# Altium PCB Team_2_PCB.PcbDoc
Units mm, origin at the board's own origin, x right, y up, seen from the top; angles counter-clockwise.
Board outline 58 x 58 mm, 2 copper layers (Top Layer, Bottom Layer), stack 1.58 mm thick; 39 components, 33 nets, 173 pads, 10 vias.
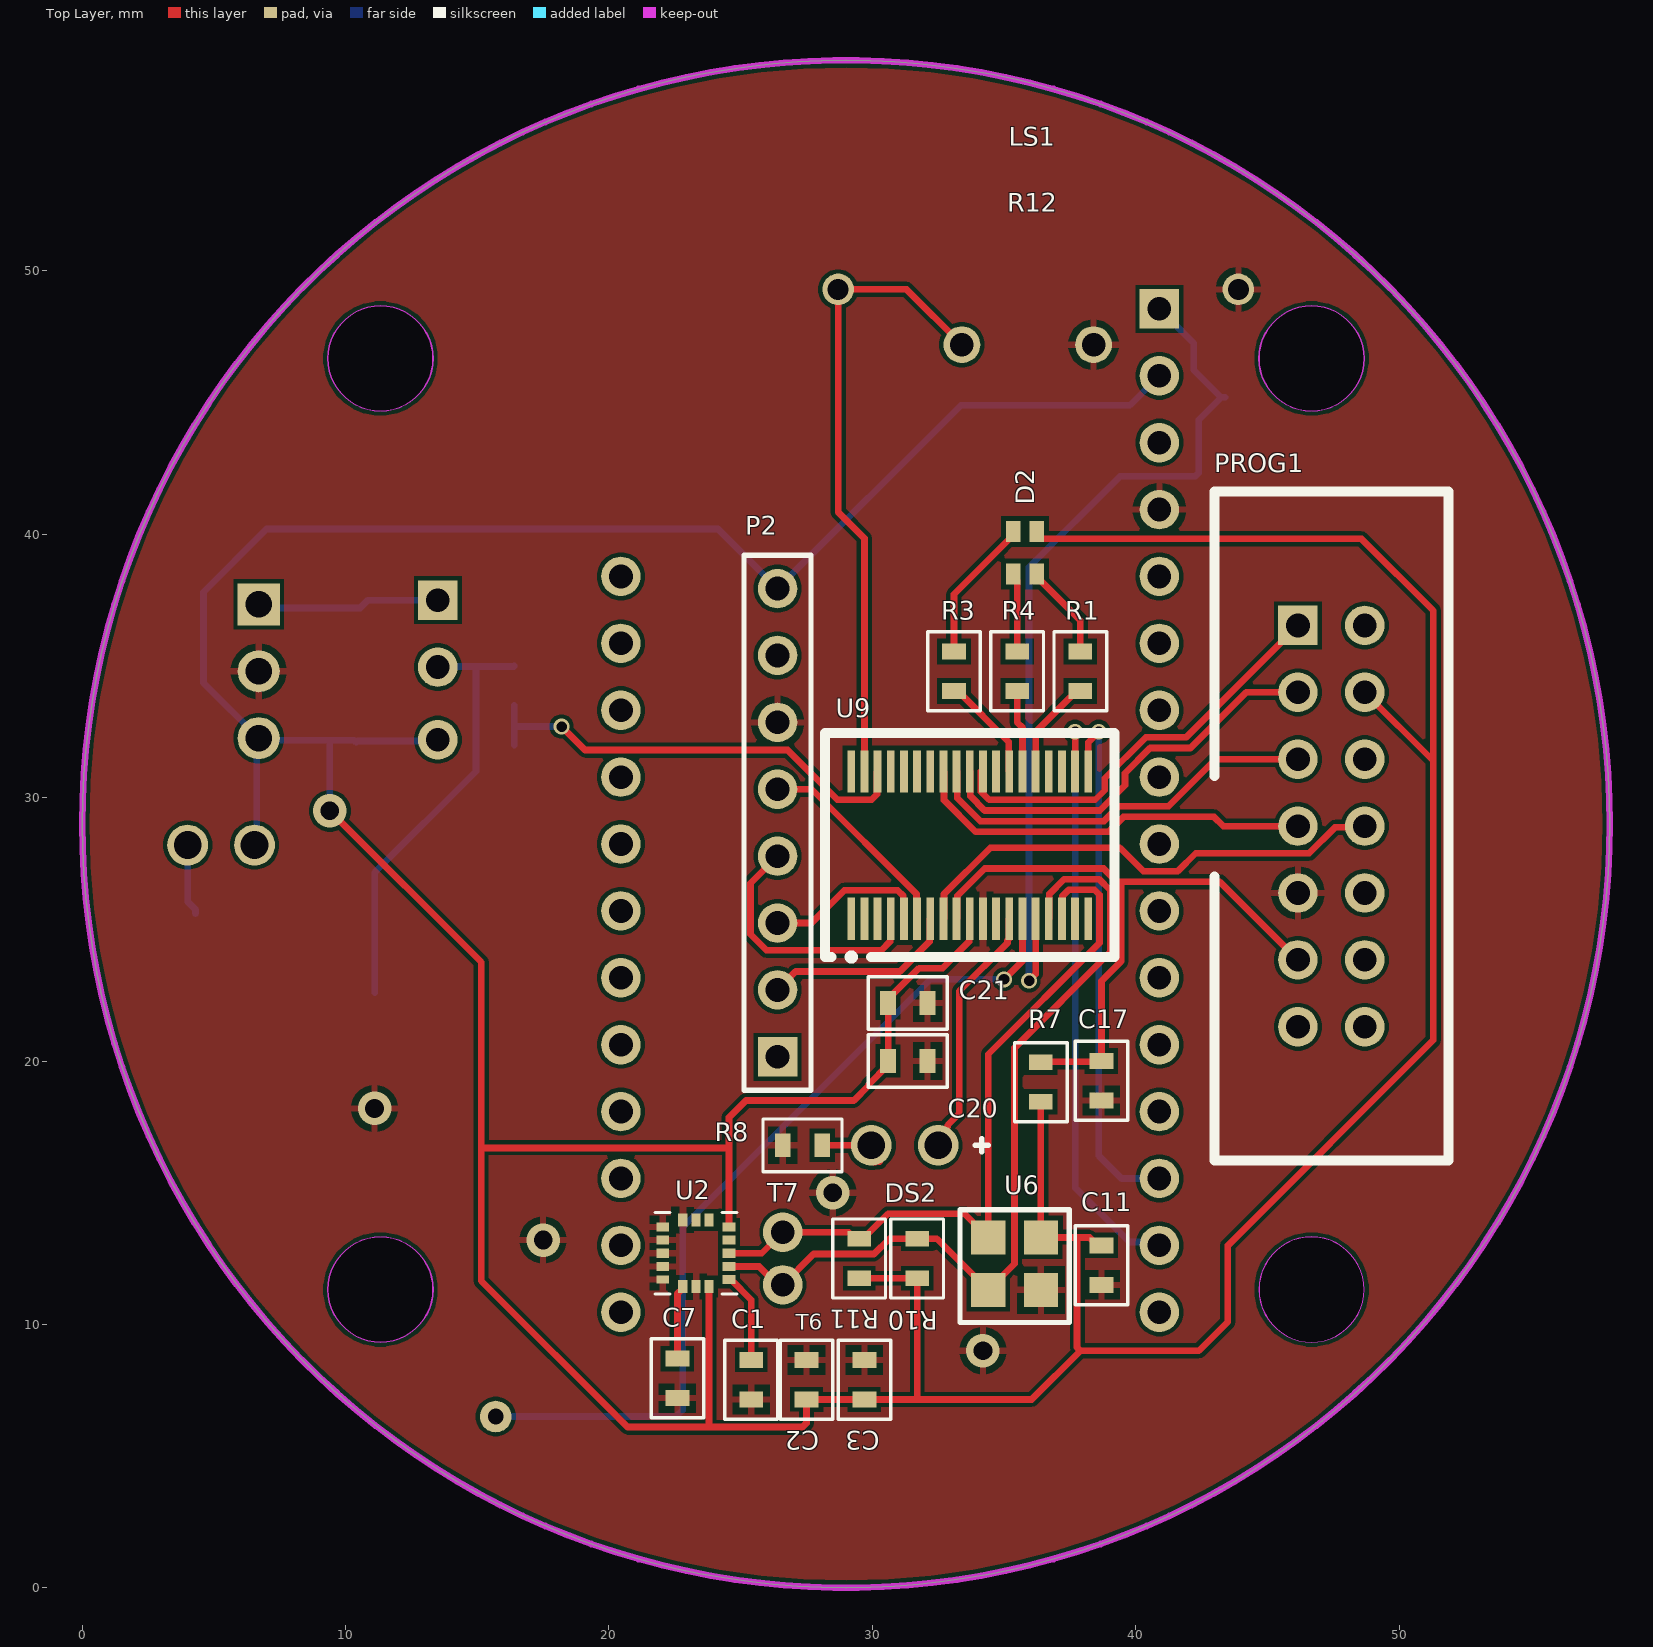
[diagram p0: Top Layer view]
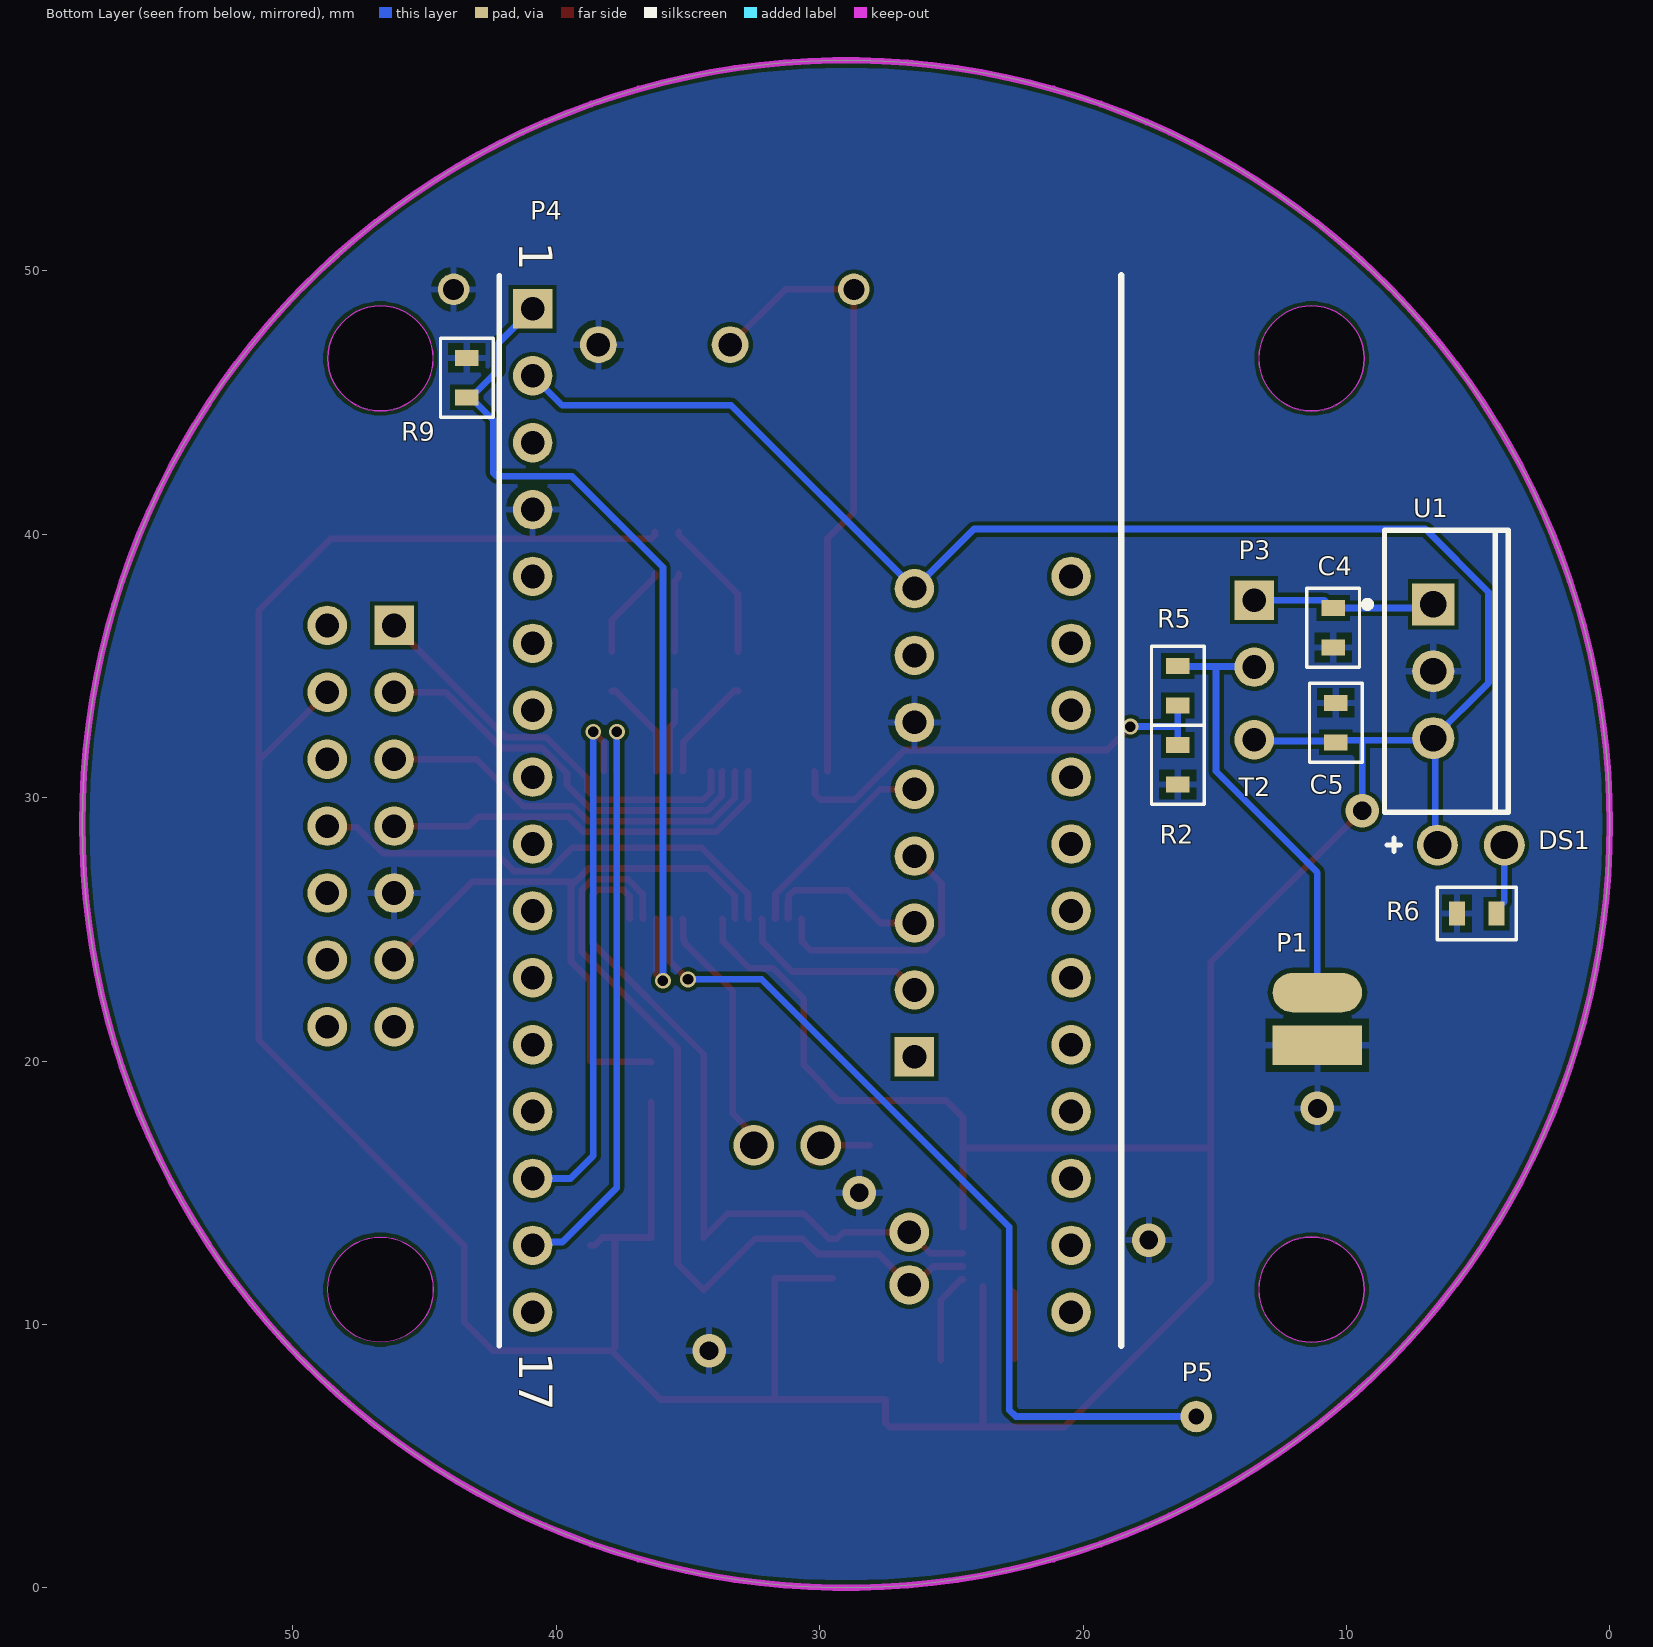
[diagram p1: Bottom Layer view, seen from below]

## Layer stack, top to bottom
Top Solder: solder mask 0.0254, SM-001, Dk 4
Top Layer: signal copper 0.0356
Dielectric 1: dielectric 1.5086, FR-4, Dk 4.8
Bottom Layer: signal copper 0.0356
Bottom Solder: solder mask 0.0254, SM-001, Dk 4

## Board outline
29,0 cw(c29,29) 0,29 cw(c29,29) 29,58 cw(c29,29) 58,29 cw(c29,29)
cut-out: 46.678,44.678 cw(c46.678,46.678) 44.678,46.678 cw(c46.678,46.678) 46.678,48.678 cw(c46.678,46.678) 48.678,46.678 cw(c46.678,46.678)
cut-out: 11.322,44.678 cw(c11.322,46.678) 9.322,46.678 cw(c11.322,46.678) 11.322,48.678 cw(c11.322,46.678) 13.322,46.678 cw(c11.322,46.678)
cut-out: 44.678,11.322 ccw(c46.678,11.322) 46.678,9.322 ccw(c46.678,11.322) 48.678,11.322 ccw(c46.678,11.322) 46.678,13.322 ccw(c46.678,11.322)
cut-out: 11.322,9.322 cw(c11.322,11.322) 9.322,11.322 cw(c11.322,11.322) 11.322,13.322 cw(c11.322,11.322) 13.322,11.322 cw(c11.322,11.322)
board region "Default Layer Stack Region": 29,0 28.186,0 26.562,0.091 24.944,0.273 23.34,0.546 21.754,0.908 20.19,1.359 18.654,1.896 17.15,2.519 15.684,3.225 14.26,4.012 12.882,4.878 11.555,5.82 10.283,6.834 9.069,7.919 7.919,9.069 6.834,10.283 5.82,11.555 4.878,12.882 4.012,14.26 3.225,15.684 2.519,17.15 1.896,18.654 1.359,20.19 0.908,21.754 0.546,23.34 0.273,24.944 0.091,26.562 0,28.186 0,29 0,29.814 0.091,31.438 0.273,33.056 0.546,34.66 0.908,36.246 1.359,37.81 1.896,39.346 2.519,40.85 3.225,42.316 4.012,43.74 4.878,45.118 5.82,46.445 6.834,47.717 7.919,48.931 9.069,50.081 10.283,51.166 11.555,52.18 12.882,53.122 14.26,53.988 15.684,54.775 17.15,55.481 18.654,56.104 20.19,56.641 21.754,57.092 23.34,57.454 24.944,57.727 26.562,57.909 28.186,58 29,58 29.814,58 31.438,57.909 33.056,57.727 34.66,57.454 36.246,57.092 37.81,56.641 39.346,56.104 40.85,55.481 42.316,54.775 43.74,53.988 45.118,53.122 46.445,52.18 47.717,51.166 48.931,50.081 50.081,48.931 51.166,47.717 52.18,46.445 53.122,45.118 53.988,43.74 54.775,42.316 55.481,40.85 56.104,39.346 56.641,37.81 57.092,36.246 57.454,34.66 57.727,33.056 57.909,31.438 58,29.814 58,29 58,28.186 57.909,26.562 57.727,24.944 57.454,23.34 57.092,21.754 56.641,20.19 56.104,18.654 55.481,17.15 54.775,15.684 53.988,14.26 53.122,12.882 52.18,11.555 51.166,10.283 50.081,9.069 48.931,7.919 47.717,6.834 46.445,5.82 45.118,4.878 43.74,4.012 42.316,3.225 40.85,2.519 39.346,1.896 37.81,1.359 36.246,0.908 34.66,0.546 33.056,0.273 31.438,0.091 29.814,0
board region "Default Layer Stack Region": 29,0 28.186,0 26.562,0.091 24.944,0.273 23.34,0.546 21.754,0.908 20.19,1.359 18.654,1.896 17.15,2.519 15.684,3.225 14.26,4.012 12.882,4.878 11.555,5.82 10.283,6.834 9.069,7.919 7.919,9.069 6.834,10.283 5.82,11.555 4.878,12.882 4.012,14.26 3.225,15.684 2.519,17.15 1.896,18.654 1.359,20.19 0.908,21.754 0.546,23.34 0.273,24.944 0.091,26.562 0,28.186 0,29 0,29.814 0.091,31.438 0.273,33.056 0.546,34.66 0.908,36.246 1.359,37.81 1.896,39.346 2.519,40.85 3.225,42.316 4.012,43.74 4.878,45.118 5.82,46.445 6.834,47.717 7.919,48.931 9.069,50.081 10.283,51.166 11.555,52.18 12.882,53.122 14.26,53.988 15.684,54.775 17.15,55.481 18.654,56.104 20.19,56.641 21.754,57.092 23.34,57.454 24.944,57.727 26.562,57.909 28.186,58 29,58 29.814,58 31.438,57.909 33.056,57.727 34.66,57.454 36.246,57.092 37.81,56.641 39.346,56.104 40.85,55.481 42.316,54.775 43.74,53.988 45.118,53.122 46.445,52.18 47.717,51.166 48.931,50.081 50.081,48.931 51.166,47.717 52.18,46.445 53.122,45.118 53.988,43.74 54.775,42.316 55.481,40.85 56.104,39.346 56.641,37.81 57.092,36.246 57.454,34.66 57.727,33.056 57.909,31.438 58,29.814 58,29 58,28.186 57.909,26.562 57.727,24.944 57.454,23.34 57.092,21.754 56.641,20.19 56.104,18.654 55.481,17.15 54.775,15.684 53.988,14.26 53.122,12.882 52.18,11.555 51.166,10.283 50.081,9.069 48.931,7.919 47.717,6.834 46.445,5.82 45.118,4.878 43.74,4.012 42.316,3.225 40.85,2.519 39.346,1.896 37.81,1.359 36.246,0.908 34.66,0.546 33.056,0.273 31.438,0.091 29.814,0
board region "Default Layer Stack Region": 29,0 28.186,0 26.562,0.091 24.944,0.273 23.34,0.546 21.754,0.908 20.19,1.359 18.654,1.896 17.15,2.519 15.684,3.225 14.26,4.012 12.882,4.878 11.555,5.82 10.283,6.834 9.069,7.919 7.919,9.069 6.834,10.283 5.82,11.555 4.878,12.882 4.012,14.26 3.225,15.684 2.519,17.15 1.896,18.654 1.359,20.19 0.908,21.754 0.546,23.34 0.273,24.944 0.091,26.562 0,28.186 0,29 0,29.814 0.091,31.438 0.273,33.056 0.546,34.66 0.908,36.246 1.359,37.81 1.896,39.346 2.519,40.85 3.225,42.316 4.012,43.74 4.878,45.118 5.82,46.445 6.834,47.717 7.919,48.931 9.069,50.081 10.283,51.166 11.555,52.18 12.882,53.122 14.26,53.988 15.684,54.775 17.15,55.481 18.654,56.104 20.19,56.641 21.754,57.092 23.34,57.454 24.944,57.727 26.562,57.909 28.186,58 29,58 29.814,58 31.438,57.909 33.056,57.727 34.66,57.454 36.246,57.092 37.81,56.641 39.346,56.104 40.85,55.481 42.316,54.775 43.74,53.988 45.118,53.122 46.445,52.18 47.717,51.166 48.931,50.081 50.081,48.931 51.166,47.717 52.18,46.445 53.122,45.118 53.988,43.74 54.775,42.316 55.481,40.85 56.104,39.346 56.641,37.81 57.092,36.246 57.454,34.66 57.727,33.056 57.909,31.438 58,29.814 58,29 58,28.186 57.909,26.562 57.727,24.944 57.454,23.34 57.092,21.754 56.641,20.19 56.104,18.654 55.481,17.15 54.775,15.684 53.988,14.26 53.122,12.882 52.18,11.555 51.166,10.283 50.081,9.069 48.931,7.919 47.717,6.834 46.445,5.82 45.118,4.878 43.74,4.012 42.316,3.225 40.85,2.519 39.346,1.896 37.81,1.359 36.246,0.908 34.66,0.546 33.056,0.273 31.438,0.091 29.814,0
board region "Default Layer Stack Region": 29,0 28.186,0 26.562,0.091 24.944,0.273 23.34,0.546 21.754,0.908 20.19,1.359 18.654,1.896 17.15,2.519 15.684,3.225 14.26,4.012 12.882,4.878 11.555,5.82 10.283,6.834 9.069,7.919 7.919,9.069 6.834,10.283 5.82,11.555 4.878,12.882 4.012,14.26 3.225,15.684 2.519,17.15 1.896,18.654 1.359,20.19 0.908,21.754 0.546,23.34 0.273,24.944 0.091,26.562 0,28.186 0,29 0,29.814 0.091,31.438 0.273,33.056 0.546,34.66 0.908,36.246 1.359,37.81 1.896,39.346 2.519,40.85 3.225,42.316 4.012,43.74 4.878,45.118 5.82,46.445 6.834,47.717 7.919,48.931 9.069,50.081 10.283,51.166 11.555,52.18 12.882,53.122 14.26,53.988 15.684,54.775 17.15,55.481 18.654,56.104 20.19,56.641 21.754,57.092 23.34,57.454 24.944,57.727 26.562,57.909 28.186,58 29,58 29.814,58 31.438,57.909 33.056,57.727 34.66,57.454 36.246,57.092 37.81,56.641 39.346,56.104 40.85,55.481 42.316,54.775 43.74,53.988 45.118,53.122 46.445,52.18 47.717,51.166 48.931,50.081 50.081,48.931 51.166,47.717 52.18,46.445 53.122,45.118 53.988,43.74 54.775,42.316 55.481,40.85 56.104,39.346 56.641,37.81 57.092,36.246 57.454,34.66 57.727,33.056 57.909,31.438 58,29.814 58,29 58,28.186 57.909,26.562 57.727,24.944 57.454,23.34 57.092,21.754 56.641,20.19 56.104,18.654 55.481,17.15 54.775,15.684 53.988,14.26 53.122,12.882 52.18,11.555 51.166,10.283 50.081,9.069 48.931,7.919 47.717,6.834 46.445,5.82 45.118,4.878 43.74,4.012 42.316,3.225 40.85,2.519 39.346,1.896 37.81,1.359 36.246,0.908 34.66,0.546 33.056,0.273 31.438,0.091 29.814,0
board region "Default Layer Stack Region": 29,0 28.186,0 26.562,0.091 24.944,0.273 23.34,0.546 21.754,0.908 20.19,1.359 18.654,1.896 17.15,2.519 15.684,3.225 14.26,4.012 12.882,4.878 11.555,5.82 10.283,6.834 9.069,7.919 7.919,9.069 6.834,10.283 5.82,11.555 4.878,12.882 4.012,14.26 3.225,15.684 2.519,17.15 1.896,18.654 1.359,20.19 0.908,21.754 0.546,23.34 0.273,24.944 0.091,26.562 0,28.186 0,29 0,29.814 0.091,31.438 0.273,33.056 0.546,34.66 0.908,36.246 1.359,37.81 1.896,39.346 2.519,40.85 3.225,42.316 4.012,43.74 4.878,45.118 5.82,46.445 6.834,47.717 7.919,48.931 9.069,50.081 10.283,51.166 11.555,52.18 12.882,53.122 14.26,53.988 15.684,54.775 17.15,55.481 18.654,56.104 20.19,56.641 21.754,57.092 23.34,57.454 24.944,57.727 26.562,57.909 28.186,58 29,58 29.814,58 31.438,57.909 33.056,57.727 34.66,57.454 36.246,57.092 37.81,56.641 39.346,56.104 40.85,55.481 42.316,54.775 43.74,53.988 45.118,53.122 46.445,52.18 47.717,51.166 48.931,50.081 50.081,48.931 51.166,47.717 52.18,46.445 53.122,45.118 53.988,43.74 54.775,42.316 55.481,40.85 56.104,39.346 56.641,37.81 57.092,36.246 57.454,34.66 57.727,33.056 57.909,31.438 58,29.814 58,29 58,28.186 57.909,26.562 57.727,24.944 57.454,23.34 57.092,21.754 56.641,20.19 56.104,18.654 55.481,17.15 54.775,15.684 53.988,14.26 53.122,12.882 52.18,11.555 51.166,10.283 50.081,9.069 48.931,7.919 47.717,6.834 46.445,5.82 45.118,4.878 43.74,4.012 42.316,3.225 40.85,2.519 39.346,1.896 37.81,1.359 36.246,0.908 34.66,0.546 33.056,0.273 31.438,0.091 29.814,0
board region "Default Layer Stack Region": 29,0 28.186,0 26.562,0.091 24.944,0.273 23.34,0.546 21.754,0.908 20.19,1.359 18.654,1.896 17.15,2.519 15.684,3.225 14.26,4.012 12.882,4.878 11.555,5.82 10.283,6.834 9.069,7.919 7.919,9.069 6.834,10.283 5.82,11.555 4.878,12.882 4.012,14.26 3.225,15.684 2.519,17.15 1.896,18.654 1.359,20.19 0.908,21.754 0.546,23.34 0.273,24.944 0.091,26.562 0,28.186 0,29 0,29.814 0.091,31.438 0.273,33.056 0.546,34.66 0.908,36.246 1.359,37.81 1.896,39.346 2.519,40.85 3.225,42.316 4.012,43.74 4.878,45.118 5.82,46.445 6.834,47.717 7.919,48.931 9.069,50.081 10.283,51.166 11.555,52.18 12.882,53.122 14.26,53.988 15.684,54.775 17.15,55.481 18.654,56.104 20.19,56.641 21.754,57.092 23.34,57.454 24.944,57.727 26.562,57.909 28.186,58 29,58 29.814,58 31.438,57.909 33.056,57.727 34.66,57.454 36.246,57.092 37.81,56.641 39.346,56.104 40.85,55.481 42.316,54.775 43.74,53.988 45.118,53.122 46.445,52.18 47.717,51.166 48.931,50.081 50.081,48.931 51.166,47.717 52.18,46.445 53.122,45.118 53.988,43.74 54.775,42.316 55.481,40.85 56.104,39.346 56.641,37.81 57.092,36.246 57.454,34.66 57.727,33.056 57.909,31.438 58,29.814 58,29 58,28.186 57.909,26.562 57.727,24.944 57.454,23.34 57.092,21.754 56.641,20.19 56.104,18.654 55.481,17.15 54.775,15.684 53.988,14.26 53.122,12.882 52.18,11.555 51.166,10.283 50.081,9.069 48.931,7.919 47.717,6.834 46.445,5.82 45.118,4.878 43.74,4.012 42.316,3.225 40.85,2.519 39.346,1.896 37.81,1.359 36.246,0.908 34.66,0.546 33.056,0.273 31.438,0.091 29.814,0
board region "Default Layer Stack Region": 29,0 28.186,0 26.562,0.091 24.944,0.273 23.34,0.546 21.754,0.908 20.19,1.359 18.654,1.896 17.15,2.519 15.684,3.225 14.26,4.012 12.882,4.878 11.555,5.82 10.283,6.834 9.069,7.919 7.919,9.069 6.834,10.283 5.82,11.555 4.878,12.882 4.012,14.26 3.225,15.684 2.519,17.15 1.896,18.654 1.359,20.19 0.908,21.754 0.546,23.34 0.273,24.944 0.091,26.562 0,28.186 0,29 0,29.814 0.091,31.438 0.273,33.056 0.546,34.66 0.908,36.246 1.359,37.81 1.896,39.346 2.519,40.85 3.225,42.316 4.012,43.74 4.878,45.118 5.82,46.445 6.834,47.717 7.919,48.931 9.069,50.081 10.283,51.166 11.555,52.18 12.882,53.122 14.26,53.988 15.684,54.775 17.15,55.481 18.654,56.104 20.19,56.641 21.754,57.092 23.34,57.454 24.944,57.727 26.562,57.909 28.186,58 29,58 29.814,58 31.438,57.909 33.056,57.727 34.66,57.454 36.246,57.092 37.81,56.641 39.346,56.104 40.85,55.481 42.316,54.775 43.74,53.988 45.118,53.122 46.445,52.18 47.717,51.166 48.931,50.081 50.081,48.931 51.166,47.717 52.18,46.445 53.122,45.118 53.988,43.74 54.775,42.316 55.481,40.85 56.104,39.346 56.641,37.81 57.092,36.246 57.454,34.66 57.727,33.056 57.909,31.438 58,29.814 58,29 58,28.186 57.909,26.562 57.727,24.944 57.454,23.34 57.092,21.754 56.641,20.19 56.104,18.654 55.481,17.15 54.775,15.684 53.988,14.26 53.122,12.882 52.18,11.555 51.166,10.283 50.081,9.069 48.931,7.919 47.717,6.834 46.445,5.82 45.118,4.878 43.74,4.012 42.316,3.225 40.85,2.519 39.346,1.896 37.81,1.359 36.246,0.908 34.66,0.546 33.056,0.273 31.438,0.091 29.814,0
board region "Layer Stack Region 1": 29,0 28.186,0 26.562,0.091 24.944,0.273 23.34,0.546 21.754,0.908 20.19,1.359 18.654,1.896 17.15,2.519 15.684,3.225 14.26,4.012 12.882,4.878 11.555,5.82 10.283,6.834 9.069,7.919 7.919,9.069 6.834,10.283 5.82,11.555 4.878,12.882 4.012,14.26 3.225,15.684 2.519,17.15 1.896,18.654 1.359,20.19 0.908,21.754 0.546,23.34 0.273,24.944 0.091,26.562 0,28.186 0,29 0,29.814 0.091,31.438 0.273,33.056 0.546,34.66 0.908,36.246 1.359,37.81 1.896,39.346 2.519,40.85 3.225,42.316 4.012,43.74 4.878,45.118 5.82,46.445 6.834,47.717 7.919,48.931 9.069,50.081 10.283,51.166 11.555,52.18 12.882,53.122 14.26,53.988 15.684,54.775 17.15,55.481 18.654,56.104 20.19,56.641 21.754,57.092 23.34,57.454 24.944,57.727 26.562,57.909 28.186,58 29,58 29.814,58 31.438,57.909 33.056,57.727 34.66,57.454 36.246,57.092 37.81,56.641 39.346,56.104 40.85,55.481 42.316,54.775 43.74,53.988 45.118,53.122 46.445,52.18 47.717,51.166 48.931,50.081 50.081,48.931 51.166,47.717 52.18,46.445 53.122,45.118 53.988,43.74 54.775,42.316 55.481,40.85 56.104,39.346 56.641,37.81 57.092,36.246 57.454,34.66 57.727,33.056 57.909,31.438 58,29.814 58,29 58,28.186 57.909,26.562 57.727,24.944 57.454,23.34 57.092,21.754 56.641,20.19 56.104,18.654 55.481,17.15 54.775,15.684 53.988,14.26 53.122,12.882 52.18,11.555 51.166,10.283 50.081,9.069 48.931,7.919 47.717,6.834 46.445,5.82 45.118,4.878 43.74,4.012 42.316,3.225 40.85,2.519 39.346,1.896 37.81,1.359 36.246,0.908 34.66,0.546 33.056,0.273 31.438,0.091 29.814,0

## Design rules (kind name [scope] priority, off if disabled: settings)
Clearance [All] p1: gap=0.152 ignorepadtopadclearanceinfootprint=TRUE except(0.178: SMDPad-Poly)
HoleSize [All] p1: absolutevalues=TRUE maxlimit=5 minlimit=0.3 maxpercent=80.000 minpercent=20.000
MinimumSolderMaskSliver [All] p1: minsoldermaskwidth=0.05
PolygonConnect [All] p1: connectstyle=Relief reliefconductorwidth=0.254 reliefentries=4 polygonreliefangle="90 Angle" airgapwidth=0.254
RoutingVias [All] p1: holewidth=0.711 width=1.27 viastyle="Through Hole" minholewidth=0.711 minwidth=1.27 maxholewidth=0.711 maxwidth=1.27
SolderMaskExpansion [All] p1: expansion=0.102 istentingtop=FALSE
Width [All] p1: maxlimit=2.54 minlimit=0.152 preferedwidth=0.152 minimp=50.000000 maximp=50.000000 favimp=50.000000
28 further rules are at their usual default settings.

## Components (designator, comment, footprint, x,y, rotation, side; value= is the part's Value field where it differs from the comment)
C1 "C-n-010.000-5-0603" "0603 (Capacitor)" 25.4,7.9 r270 top value=10nF
C2 "C-n-001.000-5-0603" "0603 (Capacitor)" 27.5,7.9 r90 top value=1uF
C3 "C-n-001.000-5-0603" "0603 (Capacitor)" 29.7,7.9 r90 top value=2.2uF
C4 "C-n-100.000-10-0603" "0603 (Capacitor)" 10.5,36.45 r270 bottom value=100nF
C5 "C-n-100.000-10-0603" "0603 (Capacitor)" 10.4,32.85 r90 bottom value=10uF
C7 "C-n-010.000-5-0603" "0603 (Capacitor)" 22.6,7.95 r270 top value=0.47uF
C11 "C-n-010.000-5-0603" "0603 (Capacitor)" 38.7,12.25 r270 top value=10nF
C17 "C-n-002.200-5-0603" "0603 (Capacitor)" 38.7,19.25 r270 top value=2.2nF
C20 "C-n-001.000-5-0603" "0603 (Capacitor)" 31.35,20 r0 top value=10uF
C21 "C-n-100.000-10-0603" "0603 (Capacitor)" 31.35,22.2 r0 top value=100nF
D2 "EAST1616RGBB4" "EAST1616RGBB4 - duplicate1" 35.8,39.3 r90 top
DS1 "HLMP-4740" AVAG-HLMP-4740 5.27,28.2 r180 bottom
DS2 "HLMP-4740" AVAG-HLMP-4740 31.23,16.8 r180 top
LS1 "PS1440P02BT" BUZZER_PS1440P02BT 35.9,47.2 r90 top
P1 "Header 2" "Battery Connector- 620102131822" 11.1,20.6 r90 bottom
P2 "Header 8" HDR1X8 26.4,20.16 r90 top
P3 "Header 2H" HDR1X2H 13.5,37.5 r270 bottom
P4 "GNSS" HDR2X16_CEN 40.9,48.56 r270 bottom
P5 "FIX Pin" "Header 1 Pin" 15.7,6.5 r180 bottom
PROG1 "MSP430 Programming Header" "TE 2-1761603-5" 47.43,28.92 r90 top
R1 "R-k-010.000-1-0603" "0603 (Resistor)" 37.9,34.8 r90 top value=60
R2 "R-k-100.000-1-0603" "0603 (Resistor)" 16.4,31.25 r90 bottom value=100k
R3 "R-k-010.000-1-0603" "0603 (Resistor)" 33.1,34.8 r90 top value=10
R4 "R-k-010.000-1-0603" "0603 (Resistor)" 35.5,34.8 r90 top value=10
R5 "R-k-100.000-1-0603" "0603 (Resistor)" 16.4,34.25 r90 bottom value=100k
R6 "R-k-001.500-1-0603" "0603 (Resistor)" 5.05,25.6 r180 bottom value=470
R7 "R-k-047.000-1-0603" "0603 (Resistor)" 36.4,19.2 r90 top value=47k
R8 "R-k-001.500-1-0603" "0603 (Resistor)" 27.35,16.8 r180 top value=470
R9 "R-k-100.000-1-0603" "0603 (Resistor)" 43.4,45.95 r90 bottom value=100k
R10 "R-k-010.000-1-0603" "0603 (Resistor)" 31.7,12.5 r270 top value=10k
R11 "R-k-010.000-1-0603" "0603 (Resistor)" 29.5,12.5 r270 top value=10k
R12 "1.0k" "1.0K THROUGH HOLE" 43.9,49.3 r180 top
T2 "Open Pad" "Open Pad" 13.5,32.2 r180 bottom
T6 "Open Pad" "Open Pad" 26.6,11.5 r0 top
T7 "Open Pad" "Open Pad" 26.6,13.5 r0 top
U1 "LM2937ET-3.3" NDE0003A 6.7,34.8 r270 bottom
U2 "ICM-20608-G" ICM-20608-G 23.3,12.7 r180 top
U6 "MS563702BA03-50" MS5837-30BA 36.4,11.3 r270 top
U9 "MSP430FR2355 38-TFSOP" "MSP430FR2355 38-TFSOP" 33.7,28.2 r0 top

## Footprints (in the part's own frame and the unit in brackets; to place one, negate y for a bottom-side part, rotate by r counter-clockwise, add the part's x,y. Pads: shape width x height; smd on the part's side, far side on the other; paste and mask are expansions set on the pad)
"1.0K THROUGH HOLE" [mm]
  round 1.2 hole 0.8: 1(0,0) 2(15.2,0)
"0603 (Capacitor)" [mm]
  rect 0.6x0.9 smd mask+0.05: 1(-0.75,0) 2(0.75,0)
  silkscreen extent -1.5,-1 1.5,1, body extent -0.77,-0.42 0.78,0.43, height 0.45
"0603 (Resistor)" [mm]
  rect 0.6x0.9 smd mask+0.05: 1(-0.75,0) 2(0.75,0)
  silkscreen extent -1.5,-1 1.5,1, body extent -0.77,-0.42 0.78,0.43, height 0.45
AVAG-HLMP-4740 [mm] "THD, 2-Leads, Dia 5.845mm, Pitch 2.54mm"
  round 1.55 hole 1.05: 1(-1.27,0) 2(1.27,0)
  silkscreen extent -3.17,-0.25 -2.68,0.25
"Battery Connector- 620102131822" [mm]
  rect 1.5x3.4 smd: 1(0,0)
  oval 1.5x3.4 smd: 2(2,0)
BUZZER_PS1440P02BT [mm]
  round 1.398 hole 0.89: 1(0,2.5) 2(0,-2.5)
"EAST1616RGBB4 - duplicate1" [mm]
  rect 0.8x0.55 smd: 1(-0.8,-0.45) 2(-0.8,0.45) 3(0.8,0.45) 4(0.8,-0.45)
HDR1X2H [mm] "Connector; Header; 2 Position; Right Angle"
  rect 1.5x1.5 hole 0.9: 1(0,0)
  round 1.5 hole 0.9: 2(2.54,0)
HDR1X8 [mm] "Connector; Header; 8 Position"
  rect 1.5x1.5 hole 0.9: 1(0,0)
  round 1.5 hole 0.9: 2(2.54,0) 3(5.08,0) 4(7.62,0) 5(10.16,0) 6(12.7,0) 7(15.24,0) 8(17.78,0)
  silkscreen extent -1.27,-1.27 19.05,1.27
HDR2X16_CEN [mm] "Connector; Header; 16x2 Position"
  rect 1.5x1.5 hole 0.9: 1(0,0)
  round 1.5 hole 0.9: 2(2.54,0) 3(5.08,0) 4(7.62,0) 5(10.16,0) 6(12.7,0) 7(15.24,0) 8(17.78,0) 9(20.32,0) 10(22.86,0) 11(25.4,0) 12(27.94,0) 13(30.48,0) 14(33.02,0) 15(35.56,0) 16(38.1,0) 17(38.1,20.447) 18(35.56,20.447) 19(33.02,20.447) 20(30.48,20.447) 21(27.94,20.447) 22(25.4,20.447) 23(22.86,20.447) 24(20.32,20.447) 25(17.78,20.447) 26(15.24,20.447) 27(12.7,20.447) 28(10.16,20.447)
  silkscreen extent -1.27,-1.27 39.37,22.35
"Header 1 Pin" [mm]
  round 1.2 hole 0.6: 1(0,0)
ICM-20608-G [mm]
  rect 0.49x0.35 smd: 1(-1.26,1) 2(-1.26,0.5) 3(-1.26,0) 4(-1.26,-0.5) 5(-1.26,-1) 9(1.26,-1) 10(1.26,-0.5) 11(1.26,0) 12(1.26,0.5)
  rect 0.35x0.49 smd: 6(-0.5,-1.26) 7(0,-1.26) 8(0.5,-1.26) 14(0.5,1.26) 15(0,1.26) 16(-0.5,1.26)
  rect 0.49x0.3 smd: 13(1.26,1)
  silkscreen extent -1.55,-1.55 1.55,1.55, body extent -1.5,-1.5 1.5,1.5, height 0.8
MS5837-30BA [mm]
  rect 1.3x1.3 smd: 1(-2,0) 2(-2,-2) 3(0,-2) 4(0,0)
  silkscreen extent -3.05,-3.08 1.22,1.07
"MSP430FR2355 38-TFSOP" [mm]
  rect 0.3x1.6 smd paste-0.025 mask+0.05: 1(-4.5,-2.8) 2(-4,-2.8) 3(-3.5,-2.8) 4(-3,-2.8) 5(-2.5,-2.8) 6(-2,-2.8) 7(-1.5,-2.8) 8(-1,-2.8) 9(-0.5,-2.8) 10(0,-2.8) 11(0.5,-2.8) 12(1,-2.8) 13(1.5,-2.8) 14(2,-2.8) 15(2.5,-2.8) 16(3,-2.8) 17(3.5,-2.8) 18(4,-2.8) 19(4.5,-2.8) 20(4.5,2.8) 21(4,2.8) 22(3.5,2.8) 23(3,2.8) 24(2.5,2.8) 25(2,2.8) 26(1.5,2.8) 27(1,2.8) 28(0.5,2.8) 29(0,2.8) 30(-0.5,2.8) 31(-1,2.8) 32(-1.5,2.8) 33(-2,2.8) 34(-2.5,2.8) 35(-3,2.8) 36(-3.5,2.8) 37(-4,2.8) 38(-4.5,2.8)
  silkscreen extent -5.5,-4.37 5.5,4.25, body extent -4.9,-2.2 4.9,2.2, height 1.2
NDE0003A [mm] "FM, 3-Leads, Body 10.7x4.7mm, Pitch 2.54mm"
  rect 1.6x1.6 hole 1: 1(-2.54,0)
  round 1.6 hole 1: 2(0,0) 3(2.54,0)
  silkscreen extent -5.35,-2.63 5.35,2.85, body extent -5.4,-1.9 5.4,2.9, height 19.4
"Open Pad" [mm]
  round 1.5 hole 0.9: 1(0,0)
"TE 2-1761603-5" [mm] "14 Pin, 100mm, 2 Row"
  rect 1.5x1.5 hole 0.9 mask-0.1: 1(7.62,1.27)
  round 1.5 hole 0.9 mask-0.1: 2(7.62,-1.27) 3(5.08,1.27) 4(5.08,-1.27) 5(2.54,1.27) 6(2.54,-1.27) 7(0,1.27) 8(0,-1.27) 9(-2.54,1.27) 10(-2.54,-1.27) 11(-5.08,1.27) 12(-5.08,-1.27) 13(-7.62,1.27) 14(-7.62,-1.27)
  silkscreen extent -12.7,-4.45 12.7,4.45, body extent -12.7,-4.78 12.7,4.45, height 8.9

## Part data
C1 C11: "Capacitor 10nF 0603 +/-5%", Case/Package=0603, Manufacturer=Murata, Manufacturer PartNo=GRM1885C1H103JA01D, Tolerance=+/-5%
C2: "Capacitor 1uF 0603 +/-5%", Case/Package=0603, Manufacturer=Murata, Manufacturer PartNo=GCM1885C2A102JA16D, Tolerance=+/-5%
C3: "Capacitor 2,2uF 0603 +/-5%", Case/Package=0603, Manufacturer=Murata, Manufacturer PartNo=GCM1885C2A102JA16D, Tolerance=+/-5%
C4 C21: "Capacitor 100nF 0603 +/-10%", Case/Package=0603, Manufacturer=Murata, Manufacturer PartNo=GRM188R72A104KA35D, Tolerance=+/-10%
C5: "Capacitor 10uF 0603 +/-10%", Case/Package=0603, Manufacturer=Murata, Manufacturer PartNo=GRM188R72A104KA35D, Tolerance=+/-10%
C7: "Capacitor 0.47uF 0603 +/-5%", Case/Package=0603, Manufacturer=Murata, Manufacturer PartNo=GRM1885C1H103JA01D, Tolerance=+/-5%
C17: library part C-n-001.000-5-0603, "Capacitor 2.2nF 0603 +/-5%", Case/Package=0603, Manufacturer=Murata, Manufacturer PartNo=GCM1885C2A102JA16D, Tolerance=+/-5%
C20: "Capacitor 10uF 0603 +/-5%", Case/Package=0603, Manufacturer=Murata, Manufacturer PartNo=GCM1885C2A102JA16D, Tolerance=+/-5%
DS1 DS2: library part CMP-2000-06413-1, "T-1 3/4 (5 mm) Low Current LED Lamp, Green, 1.9 V, -20 to 100 degC, 2-Pin THD, RoHS, Bulk", Color=Green, Dominant Wavelength/Color Temperature=569nm, Manufacturer=AvagoTechnologies, Package=2T-13/4, Package Description="2-Pin Through Hole Device, Dia 5.845 mm, Pitch 2.54 mm", Category=LEDs, Datasheet URL=http://docs.avagotech.com/docs/AV02-1557EN, Datasheet Version=07/2014, Intensity=2.3mcd, Lens Appearance=ColoredDiffused, Lens Shape Type=Circular, Manufacturer URL=http://www.avagotech.com/, Mounting=ThroughHole, Mounting Orientation=TopMount, Mounting Technology=ThroughHole, Number of LEDs=1, Package Reference=HLMP-4740, Packaging=Bulk, Peak Wavelength=565nm, Pin Count=2, Rad Hard=No, Type=Uni-Color, Viewing Angle=50°
LS1: "Buzzers Transducer, Externally Driven Piezo 3V 4kHz 75dB @ 3V, 10cm Through Hole PC Pins", Package="SOP-8 TDK", Digi-Key_Part_Number=445-5242-1-ND, Digi-Key_Purchase_URL=https://www.digikey.com/product-detail/en/tdk-corporation/PS1440P02BT/445-5242-1-ND/2236832?utm_source=snapeda&utm_medium=aggregator&utm_campaign=symbol, MF=TDK, MP=PS1440P02BT, SnapEDA_Link=https://www.snapeda.com/parts/PS1440P02BT/TDK/view-part/295705/?ref=snap
P1: "Header, 2-Pin", LatestRevisionDate=17-Jul-2002, LatestRevisionNote="Re-released for DXP Platform.", Publisher="Altium Limited"
P2: "Header, 8-Pin", LatestRevisionDate=17-Jul-2002, LatestRevisionNote="Re-released for DXP Platform.", Publisher="Altium Limited"
P3: "Header, 2-Pin, Right Angle", LatestRevisionDate=17-Jul-2002, LatestRevisionNote="Re-released for DXP Platform.", Publisher="Altium Limited"
P4: library part "Header 16X2A", "Header, 16-Pin, Dual row", LatestRevisionDate=17-Jul-2002, LatestRevisionNote="Re-released for DXP Platform.", Publisher="Altium Limited"
P5: library part "Head 1-pin"
PROG1: "14 Pin JTAG Header for MSP430 Debug Probe", Manufacturer="TE Connectivity", Manufucturer PartNo=2-1761603-5
R1: "Resistor 60 0603 +/-1%", Case/Package=0603, Manufacturer="Vishay Dale", Manufacturer PartNo=CRCW060310K0FKEAHP, Tolerance=+/-1%
R2 R5 R9: "Resistor 100k 0603 +/-1%", Case/Package=0603, Manufacturer="Vishay Dale", Manufacturer PartNo=CRCW0603100KFKEAHP, Tolerance=+/-1%
R3 R4: "Resistor 10 0603 +/-1%", Case/Package=0603, Manufacturer="Vishay Dale", Manufacturer PartNo=CRCW060310K0FKEAHP, Tolerance=+/-1%
R6 R8: "Resistor 1.5k 0603 +/-1%", Case/Package=0603, Manufacturer="Vishay Dale", Manufacturer PartNo=CRCW06031K50FKEAHP, Tolerance=+/-1%
R7: library part R-k-068.000-1-0603, "Resistor 47k 0603 +/-1%", Case/Package=0603, Manufacturer="Vishay Dale", Manufacturer PartNo=CRCW060368K0FKEAHP, Tolerance=+/-1%
R10 R11: "Resistor 10k 0603 +/-1%", Case/Package=0603, Manufacturer="Vishay Dale", Manufacturer PartNo=CRCW060310K0FKEAHP, Tolerance=+/-1%
R12: library part "1.0k through hole resistor"
U1: library part CMP-0062-02522-3, "500 mA Low Dropout Regulator, 3-pin TO-220", Manufacturer="Texas Instruments", PackageTopMarking=NSUZXYTTE#*LM2937ET*-3.3, PowerWise=N, ComponentLink1Description="Datasheet URL", ComponentLink1URL=http://www.ti.com/general/docs/lit/getliterature.tsp?genericPartNumber=LM2937-3.3&fileType=pdf, CompType="LDO IC", PackageDescription="TO-220, Molded, 3 Lead, Straight", PackageReference=NDE0003A, PinCount=3, RoHS=N
U2: "Accelerometer, Gyroscope, 6 Axis Sensor IÂ²C, SPI Output", Package="LGA-16 InvenSense", Availability=Good, MF="TDK InvenSense", MP=ICM-20608-G, Price=None, Purchase-URL=https://pricing.snapeda.com/search/part/ICM-20608-G/?ref=eda, SnapEDA_Link=https://www.snapeda.com/parts/ICM-20608-G/TDK%20InvenSense/view-part/196551/?ref=snap
U6: library part MS5837-02BA21, "Pressure Sensor, Absolute, 2Bar, I2C", Case/Package=SMD/SMT, Manufacturer="TE Connectivity", Max Operating Temperature=85°C, Min Operating Temperature=-20°C, Operating Pressure=17.4PSI, ComponentLink1Description=https://www.te.com/commerce/DocumentDelivery/DDEController?Action=srchrtrv&amp;DocNm=MS5837-02BA01&amp;DocType=DS&amp;DocLang=English&src-supplier=Digi-Key, ComponentLink1URL=https://www.te.com/commerce/DocumentDelivery/DDEController?Action=srchrtrv&amp;DocNm=MS5837-02BA01&amp;DocType=DS&amp;DocLang=English&src-supplier=Digi-Key, Manufacturer Part Number=MS5837-02BA21, Max Pressure=145.04PSI, Output Type=I2C, Port Style="No Port", Pressure Type=Absolute, Pricing 1="1=12.98000, 5=11.38800, 10=10.24900, 25=9.11040, 50=8.42700, 100=7.28820, 500=6.83264, 1000=6.37714 (USD)", RoHS=No, RoHS Compliant=Yes, Stock 1=5173, Supplier 1=Digi-Key, Termination=SMD/SMT
U9: "MSP430 Microcontroller", Manufacturer="Texas Instruments", Manufacturer Part Number=MSP430FR2355TDBTR

## Via types
v1: diameter 1.27, hole 0.711, Top Layer to Bottom Layer, 4 vias
v2: diameter 0.6, hole 0.4, Top Layer to Bottom Layer, tented both sides, 4 vias
v3: diameter 1.27, hole 0.711, Top Layer to Bottom Layer, tented both sides, 1 vias
v4: diameter 0.6, hole 0.4, Top Layer to Bottom Layer, 1 vias

## Nets (pads, with @x,y where several pads share a name; then routed paths per layer and width w, separated by ;. In a path a pad name is that pad's centre, name@x,y a point inside that pad or via, vN(x,y) a via of type N, cw(c..) or ccw(c..) an arc to the next point about the centre after c; other vN are vias at no path point)
3v3: C2.1 C3.1 C5.1 C11.1 C20.1 C21.1 D2.4 DS1.1 P2.8 P4.2 PROG1.4 R7.1 R10.2 R11.2 T2.1 U1.3 U2.5 U2.16 U6.1 U9.10 | length 217
  Top Layer w0.254: v3(9.4,29.5) 15.147,23.753 15.147,16.7 ; U2.16 23.8,6.1 ; U2.5 24.56,16.7 ; R11.2 R10.2 31.7,7.25 31.8,7.15 ; U9.10 33.677,25.377 33.677,24.532 32.673,23.527 31.777,23.527 30.6,22.35 C21.1 C20.1 30.6,19.85 29.863,19.113 29.863,19.063 29.3,18.5 25.2,18.5 24.56,17.86 24.56,16.7 ; D2.4 36.25,39.975 36.398,39.827 48.573,39.827 51.3,37.1 51.3,31.4 ; R7.1 U6.1 37.775,13.3 ; C11.1 38.55,13 38.25,13.3 37.775,13.3 ; PROG1.4 51.3,31.4 ; 15.147,16.7 15.147,11.653 20.7,6.1 23.8,6.1 ; 15.147,16.7 24.56,16.7 ; 23.8,6.1 27.351,6.1 27.5,6.249 C2.1 C3.1 31.8,7.15 ; 31.8,7.15 36.05,7.15 37.9,9 ; 37.775,13.3 37.775,9.125 37.9,9 ; 37.9,9 42.4,9 43.5,10.1 43.5,13 51.3,20.8 51.3,31.4
  Bottom Layer w0.254: DS1.1 6.62,28.28 6.62,32.18 U1.3 ; v3(9.4,29.5) 9.4,32.18 ; T2.1 13.45,32.15 10.45,32.15 C5.1 10.32,32.18 9.4,32.18 ; P4.2 39.78,44.9 33.36,44.9 P2.8 24.14,40.2 7,40.2 4.6,37.8 4.6,34.36 U1.3 ; U1.3 6.78,32.18 9.4,32.18
CLK: P2.5 U9.6 | length 7.9
  Top Layer w0.254: P2.5 27.7,30.32 31.677,26.343 31.677,25.423 U9.6
CS: P2.2 U9.7 | length 7.4
  Top Layer w0.254: P2.2 26.4,22.711 27.089,23.4 31.045,23.4 32.177,24.532 32.177,25.377 U9.7
FIX: P5.1 U9.14 | length 32.8
  Top Layer w0.254: v2(35,23.1) 35.7,23.8 U9.14
  Bottom Layer w0.254: P5.1 22.551,6.5 22.8,6.749 22.8,13.7 32.2,23.1 v2(35,23.1)
GND: C1.2 C2.2 C3.2 C4.2 C5.2 C7.2 C11.2 C17.2 C20.2 C21.2 LS1.2 P1.1 P2.6 P4.4 PROG1.9 R2.1 R6.1 R8.2 R9.2 R12.1 U1.2 U2.8 U2.9 U2.10 U2.11 U2.12 U2.13 U2.15 U6.4 U9.11
  other v1: 34.2,9 17.5,13.2 28.5,15 11.1,18.2
"GNSS RST": P4.1 R9.1 U9.15 | length 33.8
  Top Layer w0.254: v2(35.95,23.05) 36.2,23.3 U9.15
  Bottom Layer w0.254: v2(35.95,23.05) 35.95,38.75 39.4,42.2 42.251,42.2 42.4,42.349 42.4,44.35 R9.1@43.25,45.2 ; P4.1 42.2,47.26 42.2,46.25 R9.1@43.25,45.2 ; R9.1 R9.1@43.25,45.2
JTAG_RST: C17.1 PROG1.11 R7.2 U9.9 | length 25.2
  Top Layer w0.254: U9.9 33.223,25.423 33.223,26.268 34.268,27.313 38.782,27.313 39.29,26.804 ; R7.2 36.425,19.975 38.675,19.975 C17.1 38.7,23.042 39.442,23.784 39.442,26.652 39.29,26.804 ; PROG1.11 43.196,26.804 39.29,26.804
JTAG_TEST: PROG1.8 U9.8 | length 18.7
  Top Layer w0.254: U9.8 32.723,25.423 32.723,26.343 34.48,28.1 39.4,28.1 40.289,27.211 41.602,27.211 42.282,27.891 46.586,27.891 47.569,28.873 48.653,28.873 PROG1.8
LED: DS2.1 U9.13 | length 9.7
  Top Layer w0.254: DS2.1 32.5,17.151 32.863,17.514 32.863,17.563 33.3,18 33.3,22.655 35.129,24.484 35.129,24.578 35.177,24.626 35.177,25.377 U9.13
MISO: P2.4 U9.4 | length 10
  Top Layer w0.254: P2.4 25.371,26.751 25.371,24.814 25.974,24.211 30.356,24.211 30.677,24.532 30.677,25.377 U9.4
MOSI: P2.3 U9.5 | length 6.9
  Top Layer w0.254: P2.3 27.695,25.24 28.934,26.479 30.966,26.479 31.177,26.268 31.177,25.423 U9.5 U9.5@31.2,26.05
NetC1_1: C1.1 U2.1 | length 3.4
  Top Layer w0.254: U2.1 24.63,11.7 25.4,10.93 C1.1
NetC4_1: C4.1 P3.1 U1.1 | length 7
  Bottom Layer w0.254: U1.1 6.84,37.2 10.4,37.2 10.55,37.2 10.85,37.5 P3.1
NetC7_1: C7.1 U2.14 | length 2.8
  Top Layer w0.254: C7.1 22.6,11.17 22.8,11.37 U2.14
NetD2_1: D2.1 R1.2 | length 3.6
  Top Layer w0.254: D2.1 36.25,38.375 37.9,36.725 R1.2
NetD2_2: D2.2 R4.2 | length 3
  Top Layer w0.254: D2.2 35.35,38.375 35.5,38.225 R4.2
NetD2_3: D2.3 R3.2 | length 5.5
  Top Layer w0.254: R3.2 33.1,37.725 35.35,39.975 D2.3
NetDS1_2: DS1.2 R6.2 | length 2.7
  Bottom Layer w0.254: DS1.2 4,26.05 4.3,25.75 R6.2
NetDS2_2: DS2.2 R8.1 | length 2.4
  Top Layer w0.254: R8.1 DS2.2 ; DS2.2@30.1,16.15 DS2.2@30.273,16.323 ; DS2.2@30.198,16.248 DS2.2@30.273,16.323 ; DS2.2@30.273,16.173 DS2.2@30.273,16.323
NetLS1_1: LS1.1 R12.2 U9.37 | length 24.3
  Top Layer w0.254: U9.37 29.7,39.847 28.7,40.847 R12.2 31.3,49.3 LS1.1
NetP1_2: P1.2 P3.2 R5.2 | length 17.2
  Bottom Layer w0.254: P1.2 11.1,27.153 14.95,31.003 14.95,34.98 ; P3.2@13.262,34.722 P3.2 13.52,34.98 14.95,34.98 ; R5.2 16.38,34.98 14.95,34.98
NetPROG1_1: PROG1.1 U9.28 | length 15.9
  Top Layer w0.254: U9.28@34.129,31 34.129,30.225 34.434,29.921 38.466,29.921 38.825,30.28 38.825,30.736 40.38,32.291 41.911,32.291 PROG1.1
NetPROG1_3: PROG1.3 U9.29 | length 15.7
  Top Layer w0.254: U9.29 33.723,30.977 33.723,30.057 34.266,29.514 38.634,29.514 39.591,30.471 39.591,30.927 40.548,31.884 42.079,31.884 44.195,34 PROG1.3
NetPROG1_5: PROG1.5 U9.30 | length 15.3
  Top Layer w0.254: U9.30 33.223,30.977 33.223,29.982 34.098,29.108 38.802,29.108 39.37,29.676 41.252,29.676 43.036,31.46 PROG1.5
NetPROG1_7: PROG1.7 U9.31 | length 15.4
  Top Layer w0.254: U9.31 32.723,30.977 32.723,29.908 33.929,28.701 38.971,28.701 39.539,29.269 42.974,29.269 43.323,28.92 PROG1.7
NetR1_1: R1.1 U9.24 | length 3.8
  Top Layer w0.254: U9.24 36.2,32.5 37.75,34.05 R1.1
NetR3_1: R3.1 U9.26 | length 4
  Top Layer w0.254: R3.1 33.25,34.05 35.177,32.123 35.177,31.023 U9.26
NetR4_1: R4.1 U9.25 | length 3.1
  Top Layer w0.254: R4.1 35.5,32.864 35.7,32.663 U9.25
NetR10_1: R10.1 T6.1 U2.2 U6.3 U9.16 | length 32.4
  Top Layer w0.254: U2.2 25.701,12.2 26.401,11.5 T6.1 27.771,12.671 30.066,12.671 30.645,13.25 R10.1 32.45,13.25 U6.3 35.4,12.3 35.4,20.5 39.036,24.136 39.036,26.484 38.613,26.906 37.287,26.906 36.723,26.343 36.723,25.423 U9.16
NetR11_1: R11.1 T7.1 U2.3 U6.2 U9.17 | length 28.3
  Top Layer w0.254: U2.3 25.8,12.7 T7.1 29.1,13.5 29.35,13.25 R11.1 29.65,13.25 30.6,14.2 33.5,14.2 U6.2 34.4,20.255 38.629,24.484 38.629,26.316 38.445,26.5 37.455,26.5 37.223,26.268 37.223,25.423 U9.17
RX: P4.14 U9.20 | length 20.4
  Top Layer w0.254: U9.20 38.2,32.1 v2(38.6,32.5)
  Bottom Layer w0.254: v2(38.6,32.5) 38.6,16.4 39.46,15.54 P4.14
TX: P4.15 U9.21 | length 22.9
  Top Layer w0.254: U9.21 v2(37.7,32.5)
  Bottom Layer w0.254: v2(37.7,32.5) 37.7,15.2 39.769,13.131 40.769,13.131 P4.15
Vdiv: R2.2 R5.1 U9.36 | length 17.4
  Top Layer w0.254: v4(18.2,32.7) 19.091,31.809 26.785,31.809 28.674,29.921 29.966,29.921 30.177,30.132 30.177,30.977 U9.36
  Bottom Layer w0.254: R2.2 16.4,32.75 ; R5.1 16.4,32.75 ; v4(18.2,32.7) 16.45,32.7 16.4,32.75
pads on no net: P2.1 P2.7 P4.3 P4.5 P4.6 P4.7 P4.8 P4.9 P4.10 P4.11 P4.12 P4.13 P4.16 P4.17 P4.18 P4.19 P4.20 P4.21 P4.22 P4.23 P4.24 P4.25 P4.26 P4.27 P4.28 PROG1.2 PROG1.6 PROG1.10 PROG1.12 PROG1.13 PROG1.14 U2.4 U2.6 U2.7 U9.1 U9.2 U9.3 U9.12 U9.18 U9.19 U9.22 U9.23 U9.27 U9.32 U9.33 U9.34 U9.35 U9.38

## Polygon pours and split planes (outlines as drawn)
GND on Top Layer "GND_L01_P001" (solid, remove dead copper, pour order 1): 0,0 65.2,0 65.2,59.4 60.6,64 58.8,62.2 0,62.2
GND on Bottom Layer "GND_L02_P002" (solid, remove dead copper, pour order 2): 0,0 66.8,0 69,2.2 69,72.5 1.8,72.5 0,70.7

## Keep-outs
Keep-Out Layer:
  circle w0.254: c29,29 r29
  lines w0.01: -0.005,29 cw(c29,29) 29,58.005 cw(c29,29) 58.005,29 cw(c29,29) 29,-0.005 cw(c29,29) -0.005,29 ; 9.327,11.322 cw(c11.322,11.322) 11.322,13.317 cw(c11.322,11.322) 13.317,11.322 cw(c11.322,11.322) 11.322,9.327 cw(c11.322,11.322) 9.327,11.322 ; 9.327,46.678 cw(c11.322,46.678) 11.322,48.673 cw(c11.322,46.678) 13.317,46.678 cw(c11.322,46.678) 11.322,44.683 cw(c11.322,46.678) 9.327,46.678 ; 44.683,11.322 cw(c46.678,11.322) 46.678,13.317 cw(c46.678,11.322) 48.673,11.322 cw(c46.678,11.322) 46.678,9.327 cw(c46.678,11.322) 44.683,11.322 ; 44.683,46.678 cw(c46.678,46.678) 46.678,48.673 cw(c46.678,46.678) 48.673,46.678 cw(c46.678,46.678) 46.678,44.683 cw(c46.678,46.678) 44.683,46.678

## Silkscreen, mask and mechanical layers (free items; w line width, h text height)
Mechanical 1:
  circle w0.254: c46.678,11.322 r2
  circle w0.254: c11.322,11.322 r2
  circle w0.254: c11.322,46.678 r2
  circle w0.254: c46.678,46.678 r2

## Text inside footprints (layer, text, board x,y; h text height)
P4: Bottom Overlay "17" at 41.408,8.936 h1.27 r90; Bottom Overlay "1" at 41.408,51.1 h1.27 r90